# Altium PCB PCB1.PcbDoc (part 1 of 3)
Units mil, origin at the board's own origin, x right, y up, seen from the top; angles counter-clockwise.
Board outline 3898.53 x 2644.2 mil, 4 copper layers (Top Layer, Layer 1, Layer 2, Bottom Layer), stack 64.602 mil thick; 147 components, 160 nets, 823 pads, 446 vias.
Unrouted connection lines stored in the file: 1.
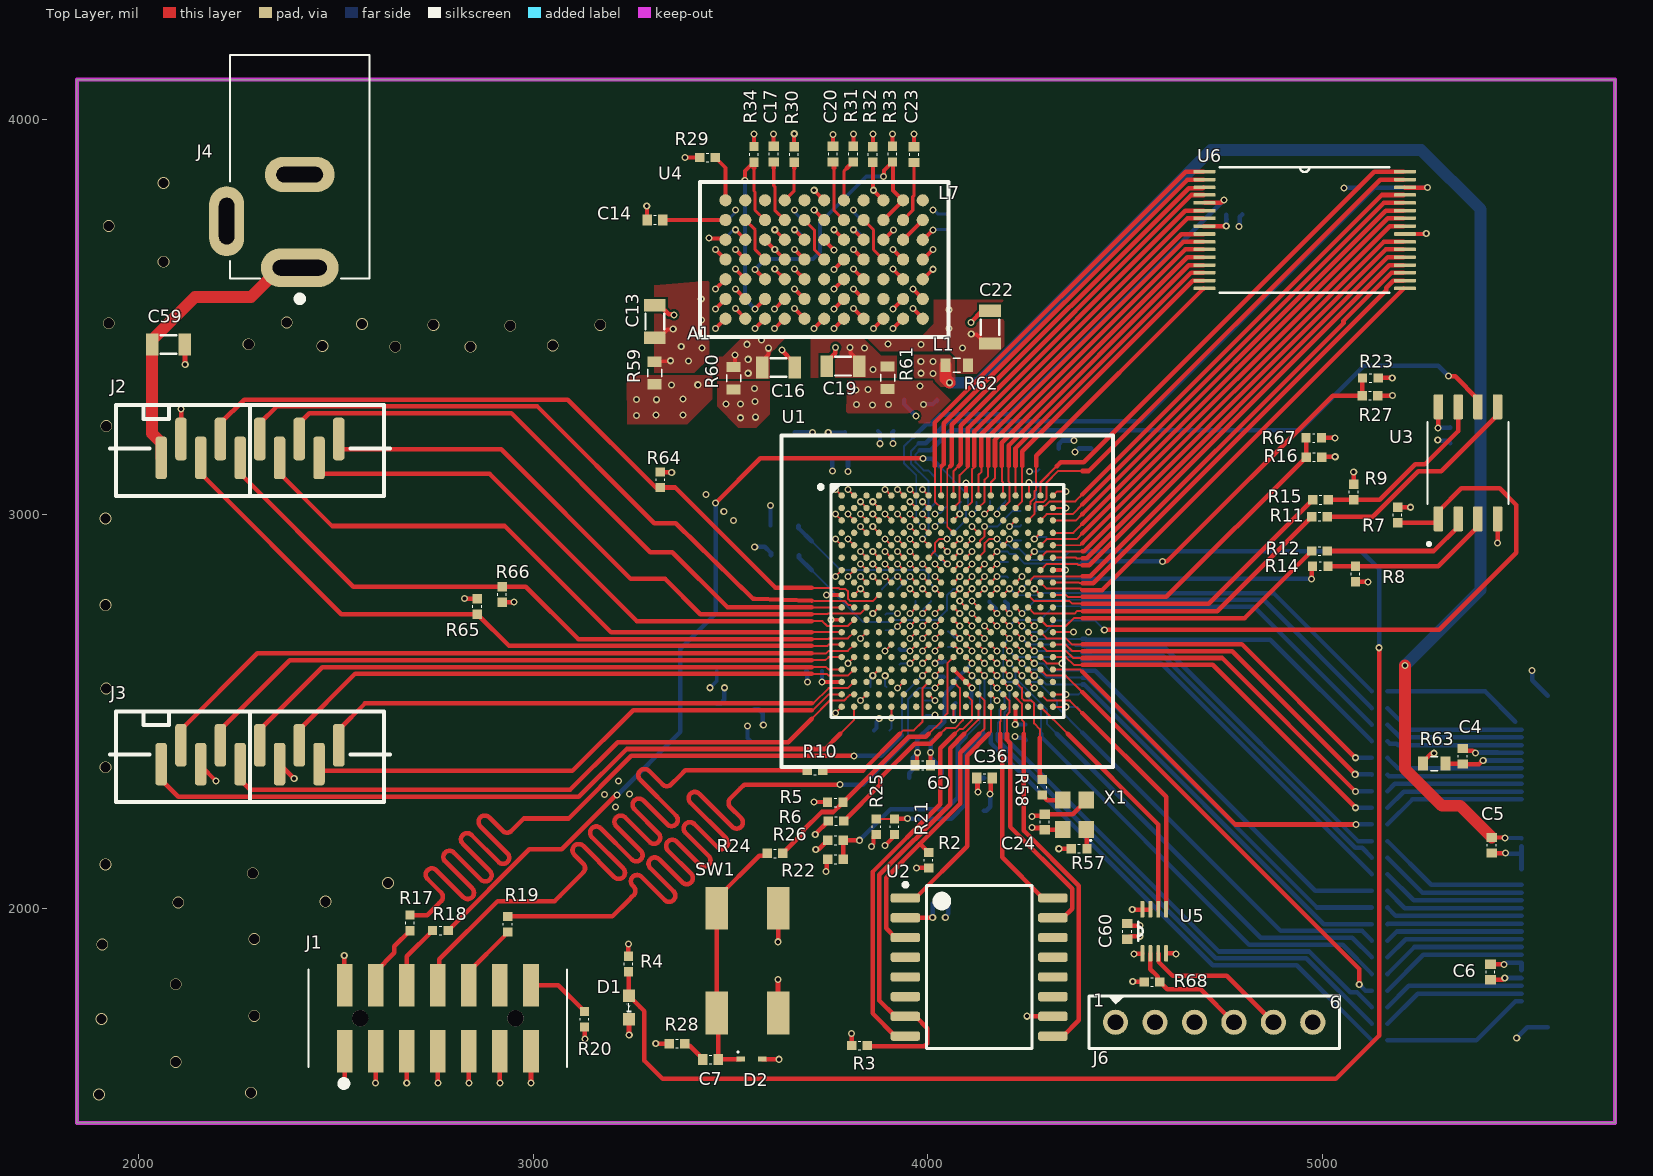
[diagram p0: Top Layer view]
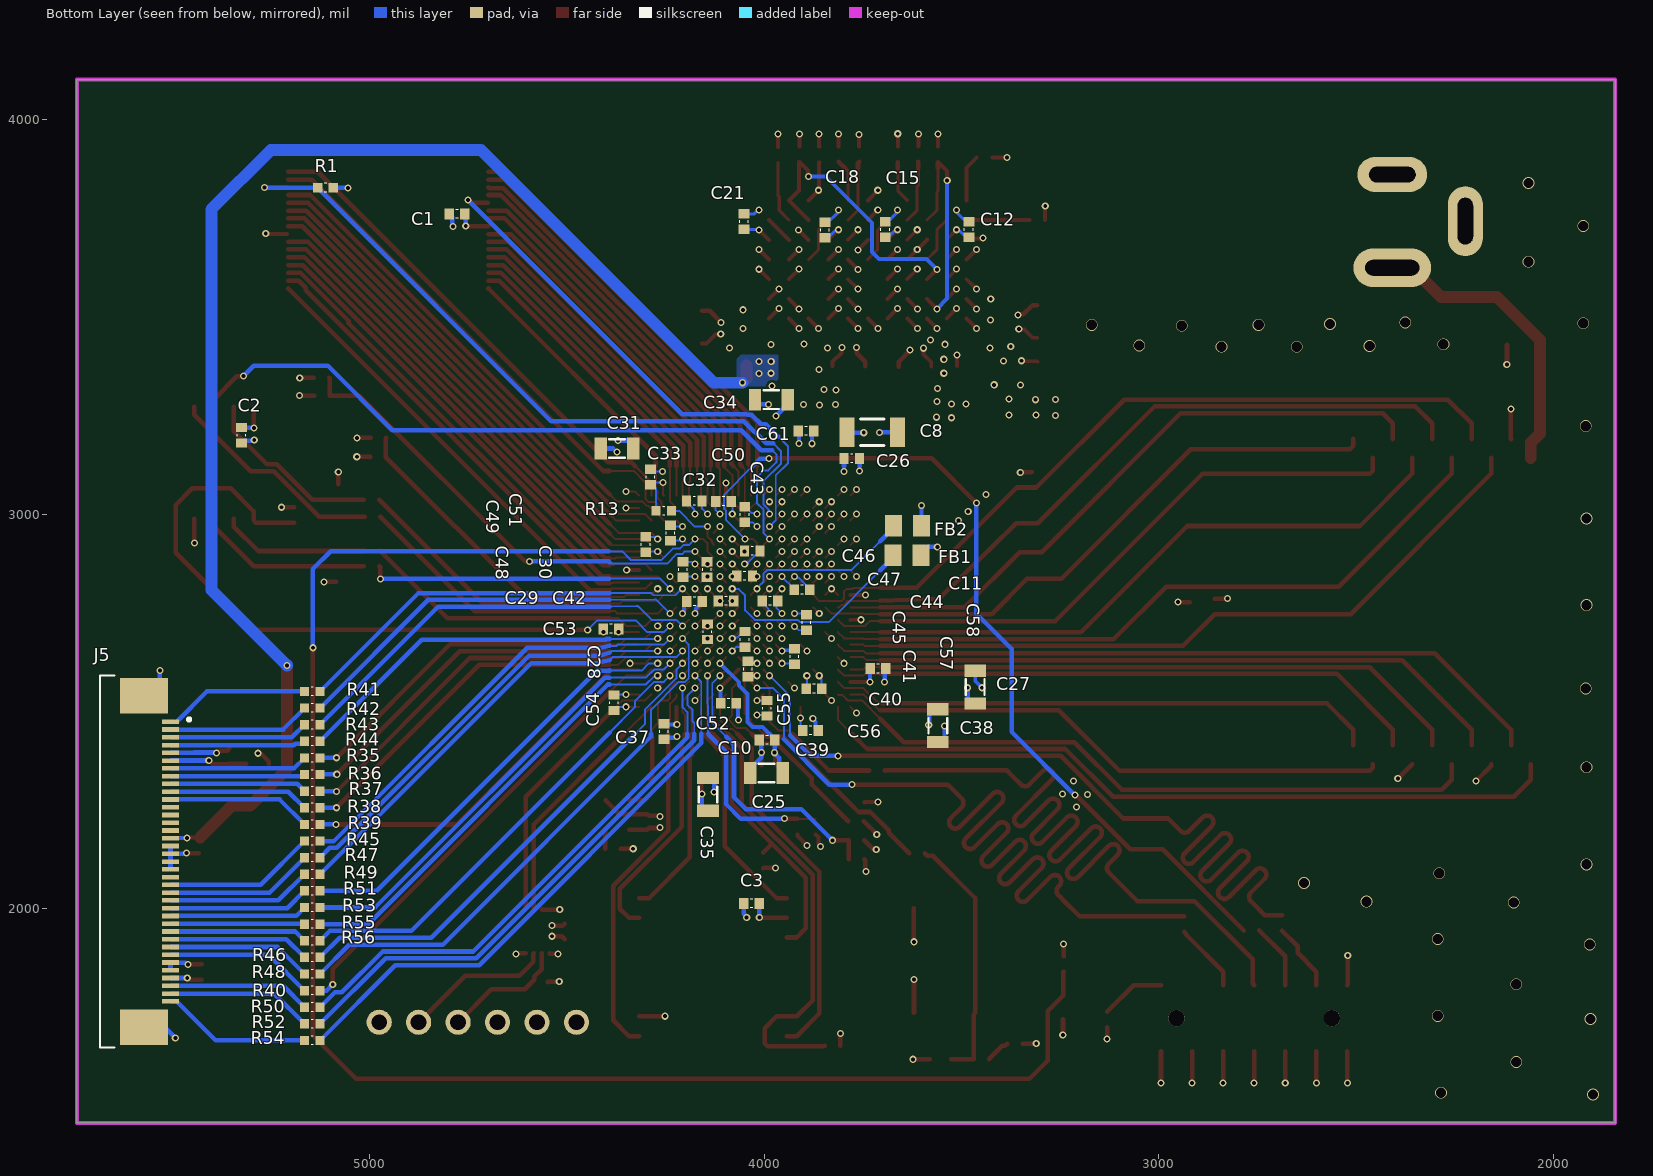
[diagram p1: Bottom Layer view, seen from below]
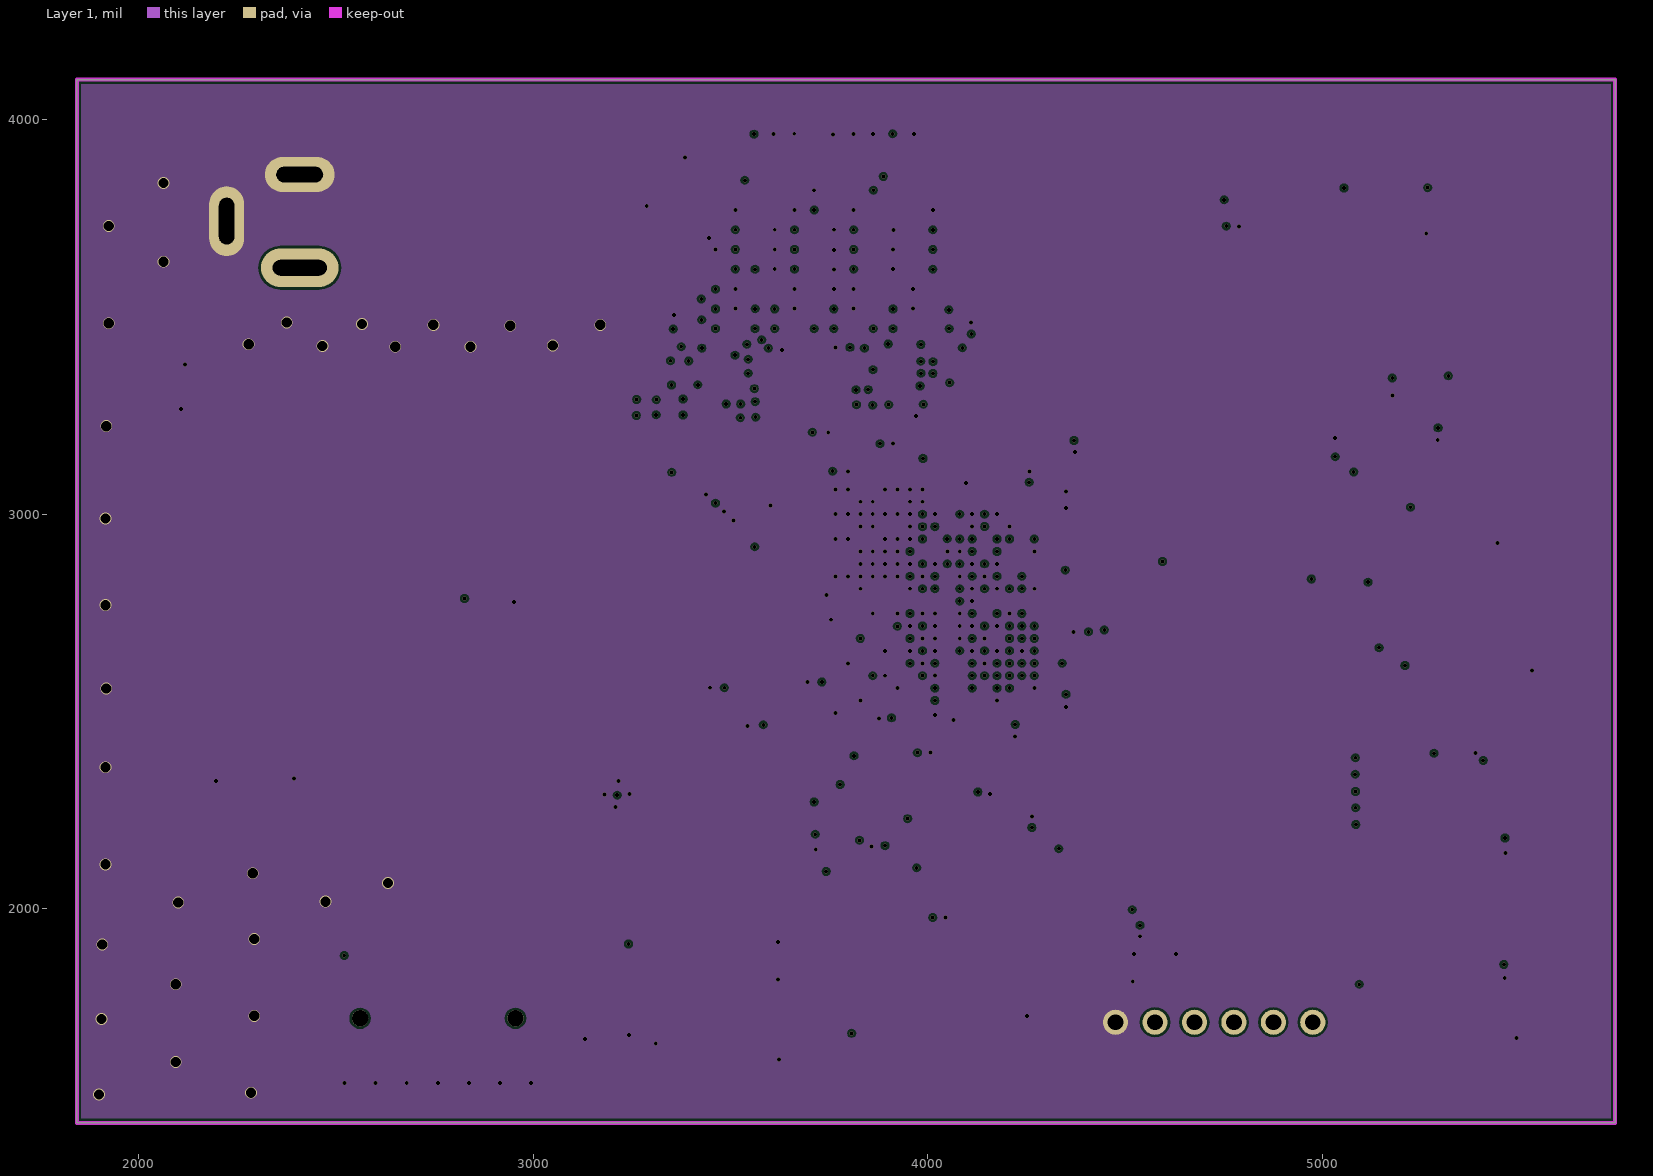
[diagram p2: Layer 1]
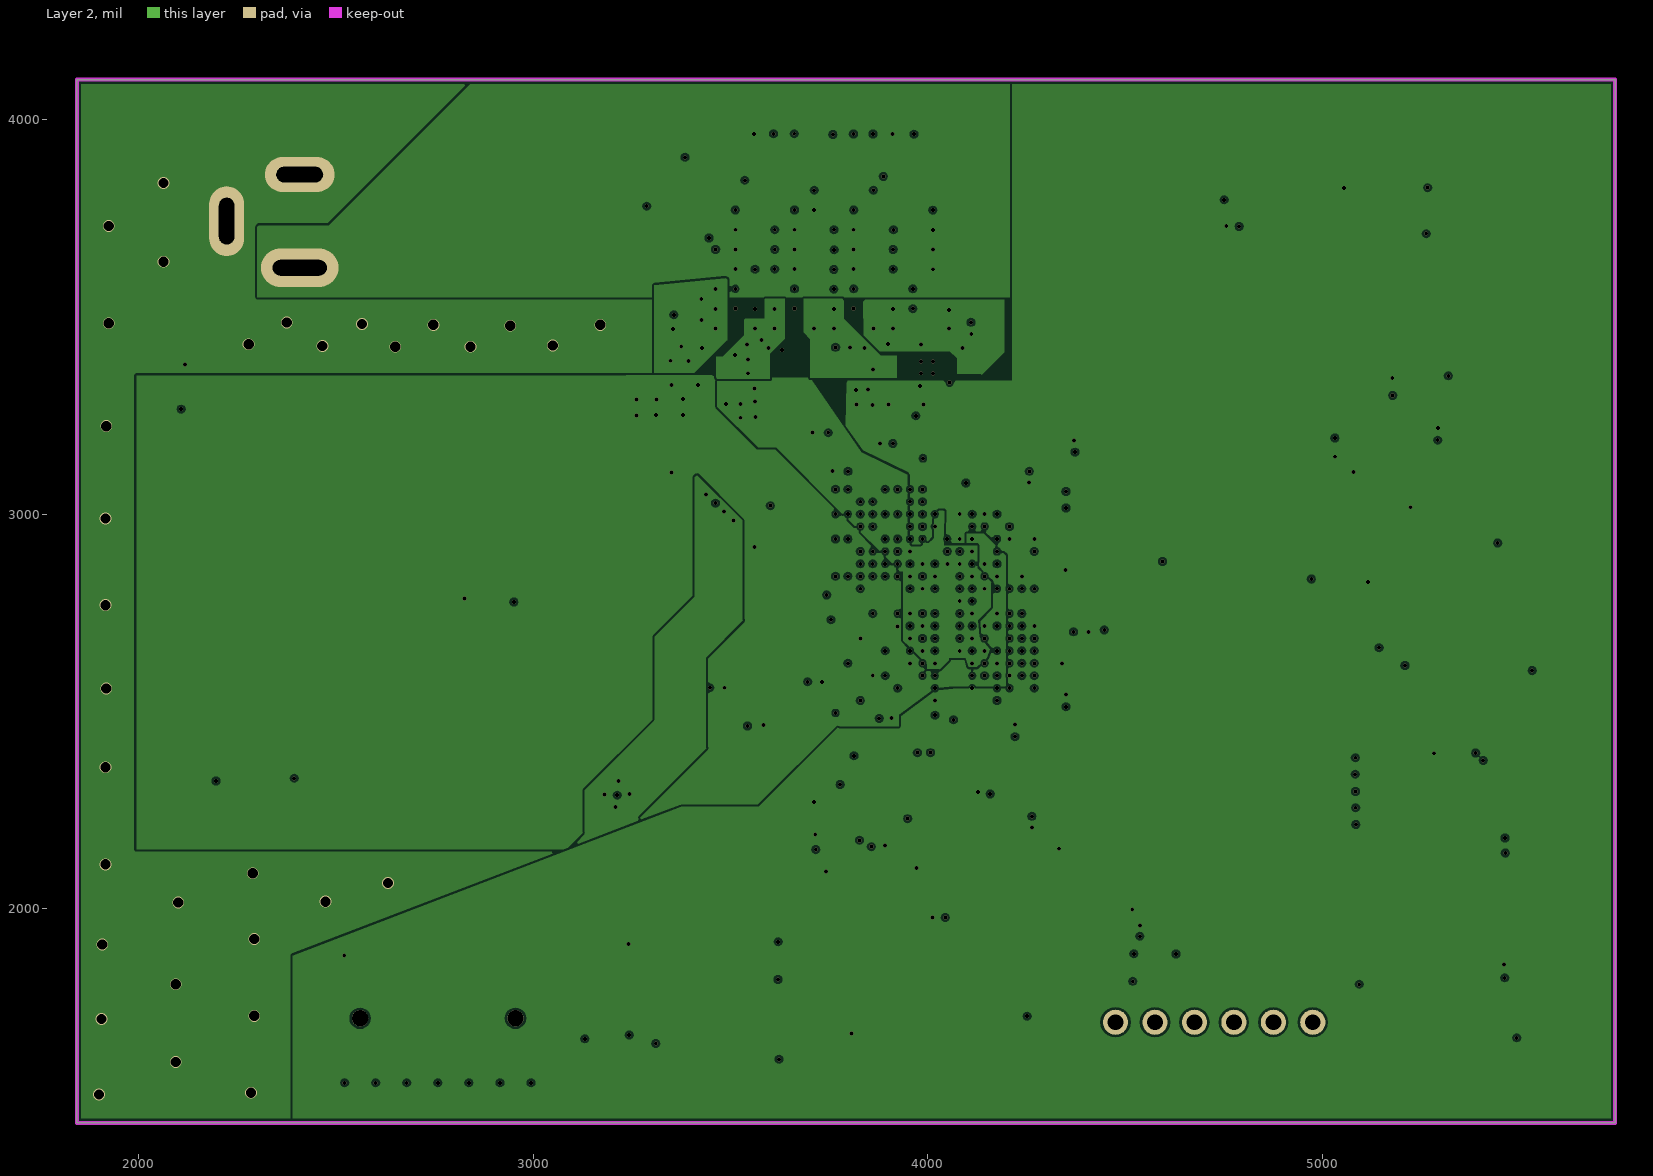
[diagram p3: Layer 2]
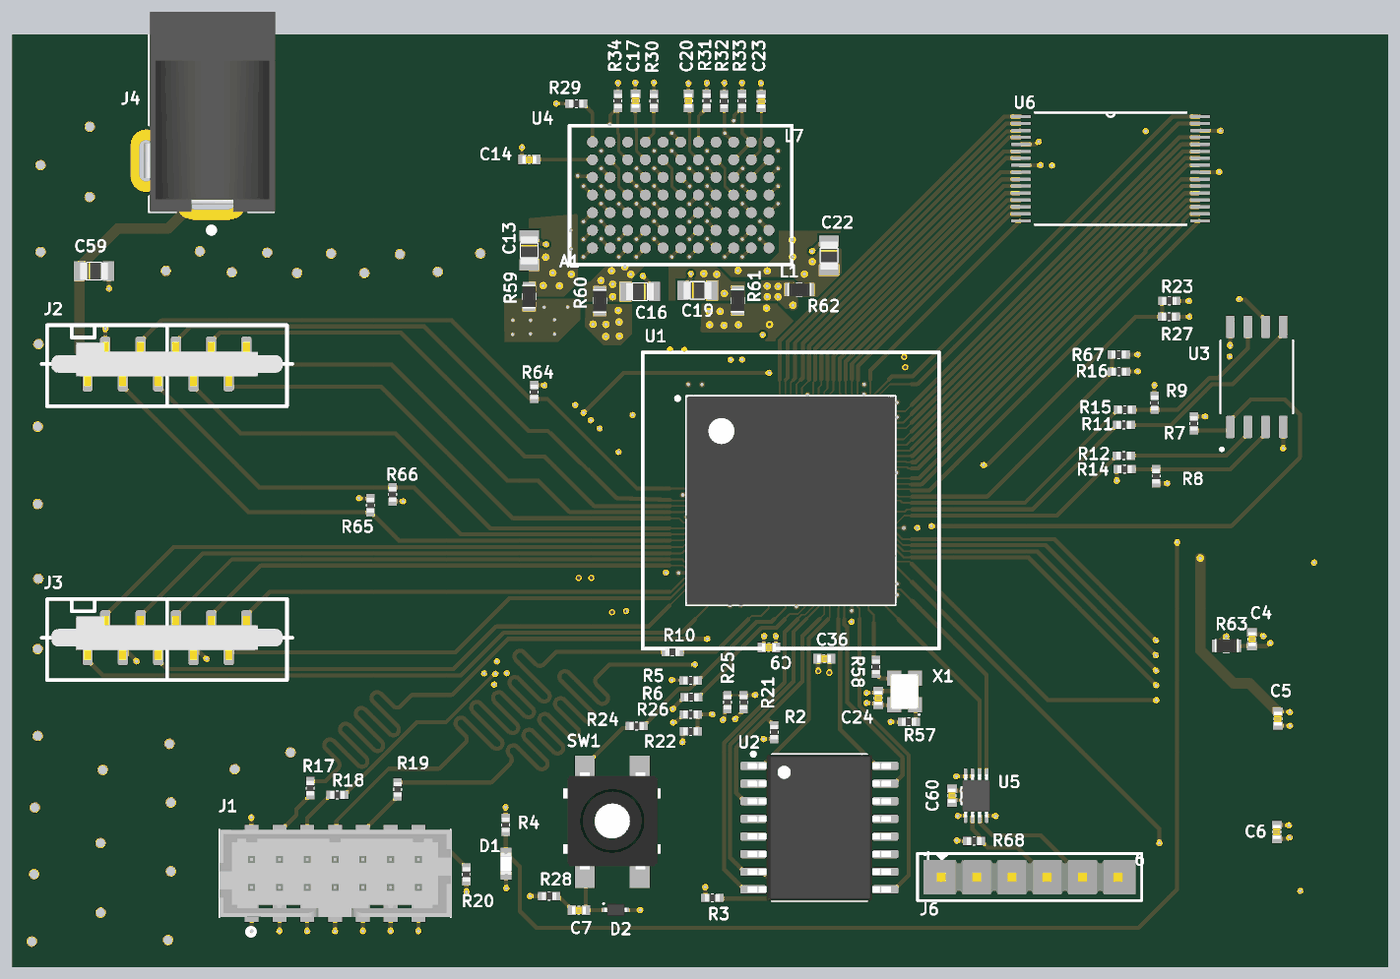
[diagram p6: 3D render of the assembled board from above, using the file's embedded part models]
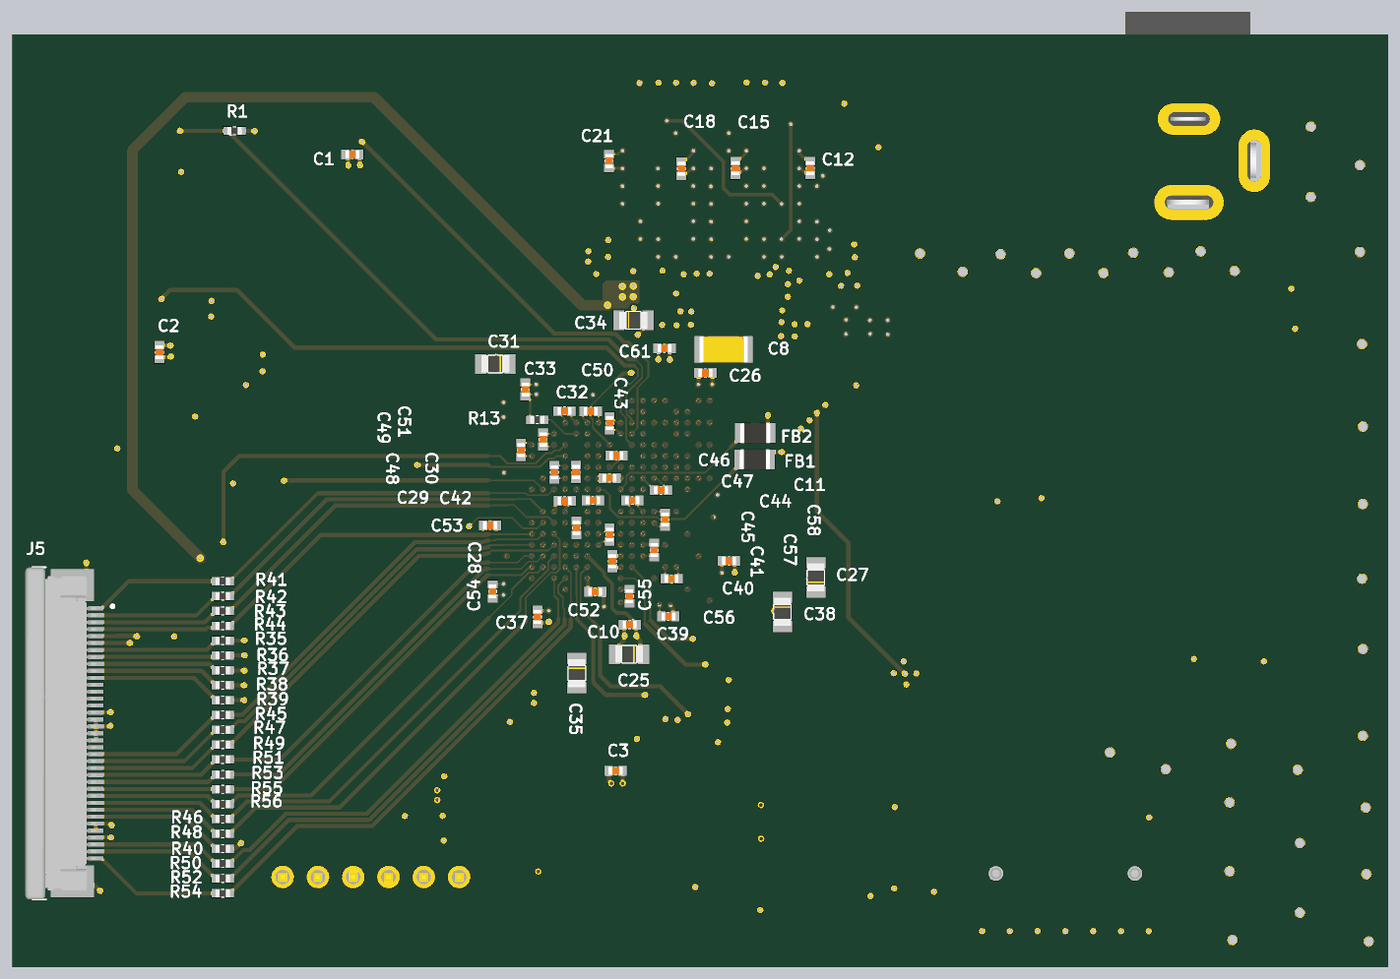
[diagram p7: 3D render of the assembled board from below, using the file's embedded part models]

## Layer stack, top to bottom
Top Solder: solder mask 1, Solder Resist, Dk 3.5
Top Layer: signal copper 1.4
Dielectric 2: prepreg 6.701, PP-006, Dk 3.69
Layer 1: signal copper 0.7
Dielectric 1: dielectric 47, FR-4, Dk 3.69
Layer 2: signal copper 0.7
Dielectric 3: prepreg 6.701, PP-006, Dk 3.69
Bottom Layer: signal copper 1.4
Bottom Solder: solder mask 1, Solder Resist, Dk 3.5

## Board outline
1843.2,1457.94 1843.2,4102.14 5741.73,4102.14 5741.73,1457.94

## Design rules (kind name [scope] priority, off if disabled: settings)
BoardOutlineClearance [All] p1: gap=10 ignorepadtopadclearanceinfootprint=FALSE except(0: Arc-SplitContinuation Track-SplitContinuation SMDPad-SplitContinuation THPad-SplitContinuation Via-SplitContinuation Fill-SplitContinuation Poly-SplitContinuation Region-SplitContinuation Text-SplitContinuation)
Clearance ClearancePolygons [All vs InPolygon] p1: gap=6 ignorepadtopadclearanceinfootprint=FALSE
Clearance Clearance_XBGA [WithinRoom('XBGA')] p2: gap=4.2 ignorepadtopadclearanceinfootprint=FALSE
Clearance Clearance_Regulator [WithinRoom('Regulator')] p3: gap=5 ignorepadtopadclearanceinfootprint=FALSE
Clearance [All] p4: gap=5 ignorepadtopadclearanceinfootprint=FALSE
FanoutControl Fanout_BGA_Regulator [WithinRoom('Regulator')] p1: bgadir=Out bgaviamode=Centered fanoutstyle=BGA fanoutdirection=Alternating viagrid=1 // Fanout_BGA (Default Rule)
FanoutControl Fanout_BGA [IsBGA] p2: bgadir=Out bgaviamode=Centered fanoutstyle=BGA fanoutdirection=Alternating viagrid=1 // Fanout_BGA (Default Rule)
FanoutControl Fanout_LCC [IsLCC] p3: bgadir=Out bgaviamode=Centered fanoutstyle=Auto fanoutdirection=Alternating viagrid=1 // Fanout_LCC (Default Rule)
FanoutControl Fanout_SOIC [IsSOIC] p4: bgadir=Out bgaviamode=Centered fanoutstyle=Auto fanoutdirection=Alternating viagrid=1 // Fanout_SOIC (Default Rule)
FanoutControl Fanout_Small [(CompPinCount < 5)] p5: bgadir=Out bgaviamode=Centered fanoutstyle=Auto fanoutdirection=OutThenIn viagrid=1 // Fanout_Small (Default Rule)
FanoutControl Fanout_Default [All] p6: bgadir=Out bgaviamode=Centered fanoutstyle=Auto fanoutdirection=Alternating viagrid=1 // Fanout_Default (Default Rule)
HoleSize [All] p1: absolutevalues=TRUE maxlimit=200 minlimit=8 maxpercent=80.000 minpercent=20.000
MatchedLengths MatchLengths_xSignals_U1_J1 [InxSignalClass('xSignals_U1_J1_MatchLengthsClass')] p1: tolerance=100 checknetsindiffpair=FALSE checkdiffpairvsdiffpair=TRUE checkxsignals=TRUE checkothers=TRUE
MinimumAnnularRing InnerLayers [OnLayer('Layer 1')] p1: minimumring=0
MinimumAnnularRing InnerLayers_1 [OnLayer('Layer 2')] p2: minimumring=0
MinimumAnnularRing [OnLayer('Top Layer')] p3: minimumring=4
MinimumAnnularRing MinimumAnnularRing_1 [OnLayer('Bottom Layer')] p4: minimumring=4
MinimumSolderMaskSliver [All] p1: minsoldermaskwidth=4
PlaneConnect [All] p1: planeconnectstyle=Relief reliefexpansion=20 reliefentries=4 reliefconductorwidth=15 reliefairgap=10
PolygonConnect [All] p1: connectstyle=Direct reliefconductorwidth=15 reliefentries=4 polygonreliefangle="90 Angle" airgapwidth=10
RoomDefinition XBGA [WithinRoom('XBGA')] p1: confinementstyle=ConfineIn formatcopy=TRUE lockcomponents=FALSE outline 3705.7,3122.88 4391.92,3122.88 4391.92,2443.9 3705.7,2443.9
RoomDefinition Regulator [WithinRoom('Regulator')] p2: confinementstyle=ConfineIn formatcopy=TRUE lockcomponents=FALSE outline 3379.94,3423.75 3379.94,3877.27 4097.86,3877.27 4097.86,3423.75
RoutingVias RoutingVias_XBGA [WithinRoom('XBGA')] p1: holewidth=10 width=18 viastyle="Through Hole" minholewidth=10 minwidth=18 maxholewidth=10 maxwidth=18
RoutingVias RoutingVias_Regulator [WithinRoom('Regulator')] p2: holewidth=10 width=18 viastyle="Through Hole" minholewidth=10 minwidth=18 maxholewidth=10 maxwidth=18
RoutingVias [All] p3: holewidth=10 width=18 viastyle="Through Hole" minholewidth=10 minwidth=18 maxholewidth=10 maxwidth=18
SilkToSilkClearance [All] p1: silktosilkclearance=4
SilkToSolderMaskClearance [IsPad vs IsText] p1: minsilkscreentomaskgap=4 clearancetoexposedcopper=TRUE
SolderMaskExpansion [All] p1: expansion=1.5 istentingtop=FALSE
Width Width_XBGA [WithinRoom('XBGA')] p1: maxlimit=10 minlimit=5 preferedwidth=5
Width Width_Regulator [WithinRoom('Regulator')] p2: maxlimit=10 minlimit=8 preferedwidth=8
Width Width_1 [InNet('+3V1')] p3: maxlimit=30 minlimit=10 preferedwidth=10
Width Width_2 [InNet('+5')] p4: maxlimit=30 minlimit=10 preferedwidth=10
Width [All] p5: maxlimit=12.33 minlimit=5 preferedwidth=11.55 midlayer1_minwidth=9.25 midlayer1_maxwidth=10.31 midlayer1_prefwidth=9.25 midlayer2_minwidth=9.25 midlayer2_maxwidth=10.31 midlayer2_prefwidth=9.25 impedanceprofiledriven=TRUE impedanceprofileid={B83657C2-D7FB-4F55-9AAE-FD7015835576} impedanceprofilevalue=50.000000 minimp=50.000000 maximp=50.000000 favimp=50.000000
20 further rules are at their usual default settings.

## Classes and differential pairs
component class "Room Definition 1": R10 R17 R18 R19 R20
component class ArtixBank34: C59 J2 J3 R64 R65 R66
component class Power: C12 C13 C14 C15 C16 C17 C18 C19 C20 C21 C22 C23 J4 R29 R30 R31 R32 R33 R34 R59 R60 R61 R62 U4
component class ArtixBank14: C3 C4 C5 C6 C24 C60 J5 J6 R2 R3 R35 R36 R37 R38 R39 R40 R41 R42 R43 R44 R45 R46 R47 R48 R49 R50 R51 R52 R53 R54 R55 R56 R57 R58 R63 R68 U2 U5 X1
component class ArtixPower: C8 C9 C10 C11 C25 C26 C27 C28 C29 C30 C31 C32 C33 C34 C35 C36 C37 C38 C39 C40 C41 C42 C43 C44 C45 C46 C47 C48 C49 C50 C51 C52 C53 C54 C55 C56 C57 C58 FB1 FB2
component class ArtixConfig: C2 C7 C61 D1 D2 J1 R4 R5 R6 R7 R8 R9 R10 R11 R12 R13 R14 R15 R16 R17 R18 R19 R20 R21 R22 R23 R24 R25 R26 R27 R28 R67 SW1 U3
component class ArtixBank15: C1 R1 U1 U6

## Components (designator, comment, footprint, x,y, rotation, side; value= is the part's Value field where it differs from the comment)
C1 "100nf" 0402Footprint#1 4778.28,3761.3 r0 bottom
C2 "100nf" 0402Footprint#1 5324.51,3200.7 r270 bottom
C3 "100nf" 0402Footprint#1 4032.23,2013.88 r0 bottom
C4 "1uf" 0402Footprint#2 5355.59,2387 r90 top
C5 "1uf" 0402Footprint#2 5429.16,2161.69 r270 top
C6 "1uf" 0402Footprint#2 5425.84,1840.59 r270 top
C7 "100nf" 0402Footprint#2 3448.66,1618.77 r0 top
C8 "100uf" 1206 3726.2,3208.46 r0 bottom
C9 "4.7uf" 0402Footprint#1 3987,2364.18 r0 top
C10 "0.47uf" 0402Footprint#1 3992.35,2428.26 r0 bottom
C11 "0.47uf" 0402Footprint#1 3903.71,2809.19 r180 bottom
C12 "10uf" 0402Footprint#1 3481.15,3722.41 r90 bottom
C13 "47uf" 0805FOOTPRINT#1 3307.82,3489.21 r270 top
C14 "100nf" 0402Footprint#2 3308.05,3746.82 r0 top
C15 "10uf" 0402Footprint#1 3692.94,3722.52 r90 bottom
C16 "47uf" 0805FOOTPRINT#1 3621.71,3372.55 r180 top
C17 "100nf" 0402Footprint#2 3609.28,3913.28 r270 top
C18 "10uf" 0402Footprint#1 3845.86,3720.77 r90 bottom
C19 "47uf" 0805FOOTPRINT#1 3785.02,3375.69 r0 top
C20 "100nf" 0402Footprint#2 3759.38,3913.22 r270 top
C21 "10uf" 0402Footprint#1 4050.81,3742.25 r90 bottom
C22 "47uf" 0805FOOTPRINT#1 4157.51,3474.59 r270 top
C23 "100nf" 0402Footprint#2 3965.26,3911.96 r270 top
C24 "100nf" 0402Footprint#2 4296.22,2220.6 r90 top
C25 "47uf" 0805FOOTPRINT#2 3993.93,2344.39 r0 bottom
C26 "0.47uf" 0402Footprint#1 3777.79,3141.48 r0 bottom
C27 "47uf" 0805FOOTPRINT#2 3464.88,2562.24 r90 bottom
C28 "4.7uf" 0402Footprint#1 4143.2,2702.68 r270 bottom
C29 "0.47uf" 0402Footprint#1 4176.29,2779.51 r0 bottom
C30 "0.47uf" 0402Footprint#1 4144.62,2860.84 r270 bottom
C31 "47uf" 0805FOOTPRINT#2 4372.76,3167.16 r0 bottom
C32 "4.7uf" 0402Footprint#1 4177.03,3033.99 r0 bottom
C33 "0.47uf" 0402Footprint#1 4287.97,3094.78 r90 bottom
C34 "47uf" 0805FOOTPRINT#2 3981.82,3290.91 r180 bottom
C35 "47uf" 0805FOOTPRINT#2 4142.26,2290.67 r270 bottom
C36 "4.7uf" 0402Footprint#2 4143.5,2332.12 r0 top
C37 "0.47uf" 0402Footprint#1 4253.9,2450.18 r270 bottom
C38 "47uf" 0805FOOTPRINT#2 3559.77,2464.5 r270 bottom
C39 "4.7uf" 0402Footprint#1 3882.69,2452.1 r180 bottom
C40 "0.47uf" 0402Footprint#1 3711.12,2609.1 r180 bottom
C41 "47nf" 0402Footprint#1 4041.15,2608.1 r270 bottom
C42 "47nf" 0402Footprint#1 4096.41,2780.55 r0 bottom
C43 "47nf" 0402Footprint#1 4049.07,2999.56 r90 bottom
C44 "47nf" 0402Footprint#1 3985.01,2780.32 r0 bottom
C45 "47nf" 0402Footprint#1 4048.93,2683.43 r90 bottom
C46 "47nf" 0402Footprint#1 4030,2907.46 r0 bottom
C47 "47nf" 0402Footprint#1 4049.34,2843.78 r0 bottom
C48 "47nf" 0402Footprint#1 4205.72,2860.27 r90 bottom
C49 "47nf" 0402Footprint#1 4300.1,2923.49 r270 bottom
C50 "47nf" 0402Footprint#1 4102.76,3033.26 r0 bottom
C51 "47nf" 0402Footprint#1 4237.57,2953.08 r90 bottom
C52 "47nf" 0402Footprint#1 4090,2521.61 r180 bottom
C53 "47nf" 0402Footprint#1 4387.81,2710.09 r180 bottom
C54 "47nf" 0402Footprint#1 4380.57,2522.58 r270 bottom
C55 "47nf" 0402Footprint#1 3992.8,2508.84 r270 bottom
C56 "47nf" 0402Footprint#1 3873.76,2558.2 r0 bottom
C57 "47nf" 0402Footprint#1 3922.99,2639.99 r90 bottom
C58 "47nf" 0402Footprint#1 3892.31,2726.17 r90 bottom
C59 "47uf" 0805FOOTPRINT#1 2075.04,3430.51 r0 top
C60 "100nf" 0402Footprint#2 4505.41,1943.34 r270 top
C61 "10nf" 0402Footprint#1 3893.5,3211.32 r0 bottom
D1 "LTST-C190GKT" 0603 3242.42,1750.24 r90 top
D2 "UCLAMP3301H.TCT" SODFL160X70-2L 3553.11,1619.66 r0 top
FB1 "600OHM 100Mhz" 0805 3637.85,2896.54 r180 bottom
FB2 "600OHM 100Mhz" 0805 3636.66,2971.58 r180 bottom
J1 "87832-1420" MOLEX_87832-1420 2757.83,1722.93 r90 top
J2 "SFM-110-02-L-S" SFM-110-02-L-S 2281.78,3167.25 r90 top
J3 "SFM-110-02-L-S" SFM-110-02-L-S 2281.78,2391.1 r90 top
J4 "PJ-002A" CUI_PJ-002A 2407.83,3625.3 r90 top
J5 "3-1734592-7" TE_3-1734592-7 5504.66,2120.16 r270 bottom
J6 "SAMTEC-HTSW-106-07-X-SJ" SAMTEC-HTSW-106-07-X-S 4725.62,1712.95 r0 top
R1 "1K" RES_CRCW_0402#1 5111.82,3828.13 r0 bottom
R2 "10K" RES_CRCW_0402#2 4001.92,2123.49 r90 top
R3 "10K" RES_CRCW_0402#2 3826.63,1653.88 r0 top
R4 "300OHM" RES_CRCW_0402#2 3240.99,1860.85 r270 top
R5 "4.7K" RES_CRCW_0402#2 3765.39,2270.22 r0 top
R6 "4.7K" RES_CRCW_0402#2 3767.08,2222.82 r0 top
R7 "4.7K" RES_CRCW_0402#2 5190.65,2998.82 r270 top
R8 "4.7K" RES_CRCW_0402#2 5083.98,2849.06 r90 top
R9 "4.7K" RES_CRCW_0402#2 5079.67,3057.01 r270 top
R10 "0OHM" RES_CRCW_0402#2 3713.95,2351.06 r180 top
R11 "100OHM" RES_CRCW_0402#2 4992.74,2994.43 r180 top
R12 "100OHM" RES_CRCW_0402#2 4992.55,2907.31 r180 top
R13 "4.7K" RES_CRCW_0402#1 4254.25,3009.01 r0 bottom
R14 "100OHM" RES_CRCW_0402#2 4994.63,2869 r180 top
R15 "100OHM" RES_CRCW_0402#2 4995.52,3037.41 r180 top
R16 "1K" RES_CRCW_0402#2 4978.63,3145.36 r180 top
R17 "0OHM" RES_CRCW_0402#2 2687.28,1964.88 r270 top
R18 "0OHM" RES_CRCW_0402#2 2764.29,1945.43 r180 top
R19 "0OHM" RES_CRCW_0402#2 2935.17,1961.43 r270 top
R20 "0OHM" RES_CRCW_0402#2 3129.87,1720.45 r90 top
R21 "1K" RES_CRCW_0402#2 3915.2,2208.43 r90 top
R22 "NC" RES_CRCW_0402#2 3765.51,2125.84 r0 top
R23 "NC" RES_CRCW_0402#2 5121.5,3346.04 r180 top
R24 "22OHM" RES_CRCW_0402#2 3612.3,2140.93 r0 top
R25 "NC" RES_CRCW_0402#2 3869.49,2208.43 r270 top
R26 "1K" RES_CRCW_0402#2 3765.51,2174 r180 top
R27 "1K" RES_CRCW_0402#2 5120.47,3301.14 r0 top
R28 "22OHM" RES_CRCW_0402#2 3364.38,1658.66 r0 top
R29 "30.1K" RES_CRCW_0402#2 3441.38,3904.93 r0 top
R30 "90.9K" RES_CRCW_0402#2 3660.98,3912.67 r270 top
R31 "13.3K" RES_CRCW_0402#2 3811.01,3913.22 r270 top
R32 "14.5K" RES_CRCW_0402#2 3860.11,3912.34 r270 top
R33 "100K" RES_CRCW_0402#2 3910.49,3913.22 r270 top
R34 "100K" RES_CRCW_0402#2 3559.31,3912.81 r270 top
R35 "200" RES_CRCW_0402#1 5145.28,2382.86 r0 bottom
R36 "200" RES_CRCW_0402#1 5145.28,2340.74 r0 bottom
R37 "200" RES_CRCW_0402#1 5145.28,2298.61 r0 bottom
R38 "200" RES_CRCW_0402#1 5145.28,2256.49 r0 bottom
R39 "200" RES_CRCW_0402#1 5145.28,2214.37 r0 bottom
R40 "200" RES_CRCW_0402#1 5145.28,1793.13 r0 bottom
R41 "200" RES_CRCW_0402#1 5145.28,2551.36 r0 bottom
R42 "200" RES_CRCW_0402#1 5145.28,2509.23 r0 bottom
R43 "200" RES_CRCW_0402#1 5145.28,2467.11 r0 bottom
R44 "200" RES_CRCW_0402#1 5145.28,2424.98 r0 bottom
R45 "200" RES_CRCW_0402#1 5145.28,2172.24 r0 bottom
R46 "200" RES_CRCW_0402#1 5145.28,1877.38 r180 bottom
R47 "200" RES_CRCW_0402#1 5145.28,2130.12 r0 bottom
R48 "200" RES_CRCW_0402#1 5145.28,1835.25 r180 bottom
R49 "200" RES_CRCW_0402#1 5145.28,2087.99 r0 bottom
R50 "200" RES_CRCW_0402#1 5145.28,1751.01 r180 bottom
R51 "200" RES_CRCW_0402#1 5145.28,2045.87 r0 bottom
R52 "200" RES_CRCW_0402#1 5145.28,1708.88 r180 bottom
R53 "200" RES_CRCW_0402#1 5145.28,2003.75 r0 bottom
R54 "200" RES_CRCW_0402#1 5145.28,1666.76 r180 bottom
R55 "200" RES_CRCW_0402#1 5145.28,1961.62 r0 bottom
R56 "200" RES_CRCW_0402#1 5145.28,1919.5 r0 bottom
R57 "1K" RES_CRCW_0402#2 4383.42,2153.07 r0 top
R58 "0OHM" RES_CRCW_0402#2 4289.82,2308.66 r270 top
R59 "0.01OHM" RESC1508X06N 3307.55,3358.48 r90 top
R60 "0.01OHM" RESC1508X06N 3507.67,3345.65 r90 top
R61 "0.01OHM" RESC1508X06N 3898.25,3346.84 r90 top
R62 "0.01OHM" RESC1508X06N 4073.43,3378.21 r0 top
R63 "0.01OHM" RESC1508X06N 5283.63,2368.3 r0 top
R64 "NC" RES_CRCW_0402#2 3321.91,3088 r270 top
R65 "NC" RES_CRCW_0402#2 2858.01,2766.84 r270 top
R66 "10K" RES_CRCW_0402#2 2920.89,2797.43 r270 top
R67 "NC" RES_CRCW_0402#2 4977.89,3194.07 r0 top
R68 "100K" RES_CRCW_0402#1 4568.37,1814.77 r180 top
SW1 "B3SN-3012P" B3SN-3012P 3549.45,1871.32 r270 top
U1 "XC7A12T CSG325" BGA324C80P18X18_1500X1500X150 4049.23,2780.23 r0 top
U2 "MT25QL256ABA8ESF-0SIT" SOP127P1030X265-16N 4129.96,1852.77 r0 top
U3 "MX25L3233FM2I-08G" SOIC127P790X216-8N_MX25L3233FM2I-08G 5369.11,3130.72 r90 top
U4 "LTM4643" "LTM4643 15X9X2.42 05-08-1908" 3737.16,3646.21 r90 top
U5 "SN74LVC2G241DCUR" SOP50P310X90-8N 4573.86,1943.27 r90 top
U6 "IS62WV5128BLL-55HLI" SOIC50P1340X125-32N 4955.07,3720.89 r0 top
X1 "100MHZ" SIT8008AI-12-33E-100.000000E 4371.36,2238.61 r180 top

## Footprints (in the part's own frame and the unit in brackets; to place one, negate y for a bottom-side part, rotate by r counter-clockwise, add the part's x,y. Pads: shape width x height; smd on the part's side, far side on the other; paste and mask are expansions set on the pad)
0402Footprint#1 [mm]
  rect 0.6x0.7 smd mask+0.051: 1(-0.5,0) 2(0.5,0)
  silkscreen extent -0.08,-0.28 0.08,0.28, body extent -0.5,-0.28 0.5,0.27, height 0.5
0402Footprint#2 [mm]
  rect 0.6x0.7 smd: 1(-0.5,0) 2(0.5,0)
  silkscreen extent -0.08,-0.28 0.08,0.28, body extent -0.5,-0.28 0.5,0.27, height 0.5
0603 [mm]
  rect 0.8x0.8 smd: 1(-0.75,0) 2(0.75,0)
  silkscreen extent -0.28,-0.15 0.28,0.15, body extent -0.8,-0.4 0.8,0.4, height 0.8
0805 [mm] "Chip Inductor, 2-Leads, Body 2.00x1.25mm, IPC Medium Density"
  rect 1.1x1.4 smd mask+0.051: 1(-0.9,0) 2(0.9,0)
  body extent -1.1,-0.73 1.1,0.72, height 1.45
0805FOOTPRINT#1 [mm]
  rect 0.8x1.4 smd: 1(-1.05,0) 2(1.05,0)
  silkscreen extent -0.5,-0.6 0.5,0.6, body extent -1,-0.62 1,0.62, height 1.45
0805FOOTPRINT#2 [mm]
  rect 0.8x1.4 smd paste+0 mask+0.051: 1(-1.05,0) 2(1.05,0)
  silkscreen extent -0.5,-0.6 0.5,0.6, body extent -1,-0.62 1,0.62, height 1.45
1206 [mm] "Chip Capacitor, 2-Leads, Body 3.20x1.60mm, IPC Medium Density"
  rect 0.95x1.9 smd: 1(-1.625,0) 2(1.625,0)
  silkscreen extent -0.75,-0.85 0.75,0.85, body extent -1.75,-0.95 1.75,0.95, height 1.6
B3SN-3012P [mm]
  rect 2.75x1.45 smd: 1(3.426,-2.135) 2(-3.324,-2.135) 3(3.426,1.815) 4(-3.324,1.815)
  body extent -3.52,-3.68 3.48,3.32, height 3.1
BGA324C80P18X18_1500X1500X150 [mm] "BGA, 324-Leads, Body 15.00x15.00mmx1.50mm, Pitch 0.80mm"
  round 0.41 smd: A1(-6.8,6.8) A2(-6,6.8) A3(-5.2,6.8) A4(-4.4,6.8) A5(-3.6,6.8) A6(-2.8,6.8) A7(-2,6.8) A8(-1.2,6.8) A9(-0.4,6.8) A10(0.4,6.8) A11(1.2,6.8) A12(2,6.8) A13(2.8,6.8) A14(3.6,6.8) A15(4.4,6.8) A16(5.2,6.8) A17(6,6.8) A18(6.8,6.8) B1(-6.8,6) B2(-6,6) B3(-5.2,6) B4(-4.4,6) B5(-3.6,6) B6(-2.8,6) B7(-2,6) B8(-1.2,6) B9(-0.4,6) B10(0.4,6) B11(1.2,6) B12(2,6) B13(2.8,6) B14(3.6,6) B15(4.4,6) B16(5.2,6) B17(6,6) B18(6.8,6) C1(-6.8,5.2) C2(-6,5.2) C3(-5.2,5.2) C4(-4.4,5.2) C5(-3.6,5.2) C6(-2.8,5.2) C7(-2,5.2) C8(-1.2,5.2) C9(-0.4,5.2) C10(0.4,5.2) C11(1.2,5.2) C12(2,5.2) C13(2.8,5.2) C14(3.6,5.2) C15(4.4,5.2) C16(5.2,5.2) C17(6,5.2) C18(6.8,5.2) D1(-6.8,4.4) D2(-6,4.4) D3(-5.2,4.4) D4(-4.4,4.4) D5(-3.6,4.4) D6(-2.8,4.4) D7(-2,4.4) D8(-1.2,4.4) D9(-0.4,4.4) D10(0.4,4.4) D11(1.2,4.4) D12(2,4.4) D13(2.8,4.4) D14(3.6,4.4) D15(4.4,4.4) D16(5.2,4.4) D17(6,4.4) D18(6.8,4.4) E1(-6.8,3.6) E2(-6,3.6) E3(-5.2,3.6) E4(-4.4,3.6) E5(-3.6,3.6) E6(-2.8,3.6) E7(-2,3.6) E8(-1.2,3.6) E9(-0.4,3.6) E10(0.4,3.6) E11(1.2,3.6) E12(2,3.6) E13(2.8,3.6) E14(3.6,3.6) E15(4.4,3.6) E16(5.2,3.6) E17(6,3.6) E18(6.8,3.6) F1(-6.8,2.8) F2(-6,2.8) F3(-5.2,2.8) F4(-4.4,2.8) F5(-3.6,2.8) F6(-2.8,2.8) F7(-2,2.8) F8(-1.2,2.8) F9(-0.4,2.8) F10(0.4,2.8) F11(1.2,2.8) F12(2,2.8) F13(2.8,2.8) F14(3.6,2.8) F15(4.4,2.8) F16(5.2,2.8) F17(6,2.8) F18(6.8,2.8) G1(-6.8,2) G2(-6,2) G3(-5.2,2) G4(-4.4,2) G5(-3.6,2) G6(-2.8,2) G7(-2,2) G8(-1.2,2) G9(-0.4,2) G10(0.4,2) G11(1.2,2) G12(2,2) G13(2.8,2) G14(3.6,2) G15(4.4,2) G16(5.2,2) G17(6,2) G18(6.8,2) H1(-6.8,1.2) H2(-6,1.2) H3(-5.2,1.2) H4(-4.4,1.2) H5(-3.6,1.2) H6(-2.8,1.2) H7(-2,1.2) H8(-1.2,1.2) H9(-0.4,1.2) H10(0.4,1.2) H11(1.2,1.2) H12(2,1.2) H13(2.8,1.2) H14(3.6,1.2) H15(4.4,1.2) H16(5.2,1.2) H17(6,1.2) H18(6.8,1.2) J1(-6.8,0.4) J2(-6,0.4) J3(-5.2,0.4) J4(-4.4,0.4) J5(-3.6,0.4) J6(-2.8,0.4) J7(-2,0.4) J8(-1.2,0.4) J9(-0.4,0.4) J10(0.4,0.4) J11(1.2,0.4) J12(2,0.4) J13(2.8,0.4) J14(3.6,0.4) J15(4.4,0.4) J16(5.2,0.4) J17(6,0.4) J18(6.8,0.4) K1(-6.8,-0.4) K2(-6,-0.4) K3(-5.2,-0.4) K4(-4.4,-0.4) K5(-3.6,-0.4) K6(-2.8,-0.4) K7(-2,-0.4) K8(-1.2,-0.4) K9(-0.4,-0.4) K10(0.4,-0.4) K11(1.2,-0.4) K12(2,-0.4) K13(2.8,-0.4) K14(3.6,-0.4) K15(4.4,-0.4) K16(5.2,-0.4) K17(6,-0.4) K18(6.8,-0.4) L1(-6.8,-1.2) L2(-6,-1.2) L3(-5.2,-1.2) L4(-4.4,-1.2) L5(-3.6,-1.2) L6(-2.8,-1.2) L7(-2,-1.2) L8(-1.2,-1.2) L9(-0.4,-1.2) L10(0.4,-1.2) L11(1.2,-1.2) L12(2,-1.2) L13(2.8,-1.2) L14(3.6,-1.2) L15(4.4,-1.2) L16(5.2,-1.2) L17(6,-1.2) L18(6.8,-1.2) M1(-6.8,-2) M2(-6,-2) M3(-5.2,-2) M4(-4.4,-2) M5(-3.6,-2) M6(-2.8,-2) M7(-2,-2) M8(-1.2,-2) M9(-0.4,-2) M10(0.4,-2) M11(1.2,-2) M12(2,-2) M13(2.8,-2) M14(3.6,-2) M15(4.4,-2) M16(5.2,-2) M17(6,-2) M18(6.8,-2) N1(-6.8,-2.8) N2(-6,-2.8) N3(-5.2,-2.8) N4(-4.4,-2.8) N5(-3.6,-2.8) N6(-2.8,-2.8) N7(-2,-2.8) N8(-1.2,-2.8) N9(-0.4,-2.8) N10(0.4,-2.8) N11(1.2,-2.8) N12(2,-2.8) N13(2.8,-2.8) N14(3.6,-2.8) N15(4.4,-2.8) N16(5.2,-2.8) N17(6,-2.8) N18(6.8,-2.8) P1(-6.8,-3.6) P2(-6,-3.6) P3(-5.2,-3.6) P4(-4.4,-3.6) P5(-3.6,-3.6) P6(-2.8,-3.6) P7(-2,-3.6) P8(-1.2,-3.6) P9(-0.4,-3.6) P10(0.4,-3.6) P11(1.2,-3.6) P12(2,-3.6) P13(2.8,-3.6) P14(3.6,-3.6) P15(4.4,-3.6) P16(5.2,-3.6) P17(6,-3.6) P18(6.8,-3.6) R1(-6.8,-4.4) R2(-6,-4.4) R3(-5.2,-4.4) R4(-4.4,-4.4) R5(-3.6,-4.4) R6(-2.8,-4.4) R7(-2,-4.4) R8(-1.2,-4.4) R9(-0.4,-4.4) R10(0.4,-4.4) R11(1.2,-4.4) R12(2,-4.4) R13(2.8,-4.4) R14(3.6,-4.4) R15(4.4,-4.4) R16(5.2,-4.4) R17(6,-4.4) R18(6.8,-4.4) T1(-6.8,-5.2) T2(-6,-5.2) T3(-5.2,-5.2) T4(-4.4,-5.2) T5(-3.6,-5.2) T6(-2.8,-5.2) T7(-2,-5.2) T8(-1.2,-5.2) T9(-0.4,-5.2) T10(0.4,-5.2) T11(1.2,-5.2) T12(2,-5.2) T13(2.8,-5.2) T14(3.6,-5.2) T15(4.4,-5.2) T16(5.2,-5.2) T17(6,-5.2) T18(6.8,-5.2) U1(-6.8,-6) U2(-6,-6) U3(-5.2,-6) U4(-4.4,-6) U5(-3.6,-6) U6(-2.8,-6) U7(-2,-6) U8(-1.2,-6) U9(-0.4,-6) U10(0.4,-6) U11(1.2,-6) U12(2,-6) U13(2.8,-6) U14(3.6,-6) U15(4.4,-6) U16(5.2,-6) U17(6,-6) U18(6.8,-6) V1(-6.8,-6.8) V2(-6,-6.8) V3(-5.2,-6.8) V4(-4.4,-6.8) V5(-3.6,-6.8) V6(-2.8,-6.8) V7(-2,-6.8) V8(-1.2,-6.8) V9(-0.4,-6.8) V10(0.4,-6.8) V11(1.2,-6.8) V12(2,-6.8) V13(2.8,-6.8) V14(3.6,-6.8) V15(4.4,-6.8) V16(5.2,-6.8) V17(6,-6.8) V18(6.8,-6.8)
  silkscreen extent -10.67,-10.67 10.67,10.67, body extent -7.5,-7.5 7.5,7.5, height 1.5
CUI_PJ-002A [mm]
  oval 2.5x5 hole 1 slot 3.5 at 90 deg: 1(0,0)
  oval 2.25x4.5 hole 1 slot 3 at 90 deg: 2(6,0)
  oval 4.5x2.25 hole 1 slot 3 at 0 deg: 3(3,4.7)
  silkscreen extent -2.2,-4.5 13.7,4.5, body extent -0.68,-4.57 13.72,4.83, height 11.1
"LTM4643 15X9X2.42 05-08-1908" [mil]
  round 31 smd: A1(-150,250) A2(-100,250) A3(-50,250) A4(0,250) A5(50,250) A6(100,250) A7(150,250) B1(-150,200) B2(-100,200) B3(-50,200) B4(0,200) B5(50,200) B6(100,200) B7(150,200) C1(-150,150) C2(-100,150) C3(-50,150) C4(0,150) C5(50,150) C6(100,150) C7(150,150) D1(-150,100) D2(-100,100) D3(-50,100) D4(0,100) D5(50,100) D6(100,100) D7(150,100) E1(-150,50) E2(-100,50) E3(-50,50) E4(0,50) E5(50,50) E6(100,50) E7(150,50) F1(-150,0) F2(-100,0) F3(-50,0) F4(0,0) F5(50,0) F6(100,0) F7(150,0) G1(-150,-50) G2(-100,-50) G3(-50,-50) G4(0,-50) G5(50,-50) G6(100,-50) G7(150,-50) H1(-150,-100) H2(-100,-100) H3(-50,-100) H4(0,-100) H5(50,-100) H6(100,-100) H7(150,-100) J1(-150,-150) J2(-100,-150) J3(-50,-150) J4(0,-150) J5(50,-150) J6(100,-150) J7(150,-150) K1(-150,-200) K2(-100,-200) K3(-50,-200) K4(0,-200) K5(50,-200) K6(100,-200) K7(150,-200) L1(-150,-250) L2(-100,-250) L3(-50,-250) L4(0,-250) L5(50,-250) L6(100,-250) L7(150,-250)
  silkscreen extent -197,-315 197,315
MOLEX_87832-1420 [mm]
  rect 2.75x1 smd: 1(-2.13,6) 2(2.13,6) 3(-2.13,4) 4(2.13,4) 5(-2.13,2) 6(2.13,2) 7(-2.13,0) 8(2.13,0) 9(-2.13,-2) 10(2.13,-2) 11(-2.13,-4) 12(2.13,-4) 13(-2.13,-6) 14(2.13,-6)
  round 1.05 hole 1.05 unplated: ""(0,5) ""(0,-5)
  silkscreen extent -4.31,-8.32 3.15,8.32, body extent -3.15,-8.33 3.15,8.32, height 7.65
RES_CRCW_0402#1 [mm]
  rect 0.6x0.6 smd paste+0 mask+0.051: 1(-0.5,0) 2(0.5,0)
  silkscreen extent -0.08,-0.28 0.08,0.28, body extent -0.52,-0.28 0.52,0.28, height 0.41
RES_CRCW_0402#2 [mm]
  rect 0.6x0.6 smd: 1(-0.5,0) 2(0.5,0)
  silkscreen extent -0.08,-0.28 0.08,0.28, body extent -0.52,-0.28 0.52,0.28, height 0.41
RESC1508X06N [mm] "Chip Resistor, 2-Leads, Body 1.55x0.80mm, IPC Medium Density"
  rect 0.65x0.9 smd: 1(-0.725,0) 2(0.725,0)
  silkscreen extent -0.23,-0.46 0.23,0.46, body extent -0.85,-0.48 0.85,0.48, height 0.55
SAMTEC-HTSW-106-07-X-S [mm]
  round 1.62 hole 1.02: 1(-6.35,0) 2(-3.81,0) 3(-1.27,0) 4(1.27,0) 5(3.81,0) 6(6.35,0)
  silkscreen extent -8.07,-1.69 8.07,1.69, body extent -7.62,-1.24 7.62,1.24, height 8.38
SFM-110-02-L-S [mil]
  rrect50% 108x29 smd: 1(-24,225) 2(24,175) 3(-24,125) 4(24,75) 5(-24,25) 6(24,-25) 7(-24,-75) 8(24,-125) 9(-24,-175) 10(24,-225)
  silkscreen extent -120,-355 110,355, body extent -62,-328 63,327, height 185
SIT8008AI-12-33E-100.000000E [mm]
  rect 1x1.1 smd: 1(-0.75,0.95) 2(-0.75,-0.95) 3(0.75,-0.95) 4(0.75,0.95)
  silkscreen extent -1.1,1.6 -1,1.7, body extent -1,-1.25 1,1.25, height 0.6
SODFL160X70-2L [mm] "SODFL, 2-Leads, Body 0.80x1.60mm, IPC High Density"
  rect 0.55x0.3 smd: A(0.7,0) C(-0.7,0)
  silkscreen extent -0.92,0.4 -0.83,0.5, body extent -0.8,-0.45 0.8,0.45, height 0.7
SOIC50P1340X125-32N [mil]
  rrect50% 56x9 smd: 1(-254,148) 2(-254,128) 3(-254,108) 4(-254,89) 5(-254,69) 6(-254,49) 7(-254,30) 8(-254,10) 9(-254,-10) 10(-254,-30) 11(-254,-49) 12(-254,-69) 13(-254,-89) 14(-254,-108) 15(-254,-128) 16(-254,-148) 17(254,-148) 18(254,-128) 19(254,-108) 20(254,-89) 21(254,-69) 22(254,-49) 23(254,-30) 24(254,-10) 25(254,10) 26(254,30) 27(254,49) 28(254,69) 29(254,89) 30(254,108) 31(254,128) 32(254,148)
  silkscreen extent -215,-159 215,159
SOIC127P790X216-8N_MX25L3233FM2I-08G [mm]
  rrect25% 1.61x0.61 smd: 1(-3.605,1.905) 2(-3.605,0.635) 3(-3.605,-0.635) 4(-3.605,-1.905) 5(3.605,-1.905) 6(3.605,-0.635) 7(3.605,0.635) 8(3.605,1.905)
  silkscreen extent -5.31,-2.62 2.64,2.62
SOP50P310X90-8N [mil]
  rrect50% 42x10 smd: 1(-56,30) 2(-56,10) 3(-56,-10) 4(-56,-30) 5(56,-30) 6(56,-10) 7(56,10) 8(56,30)
  silkscreen extent -24,29 24,41, body extent -61,-39 61,39, height 34
SOP127P1030X265-16N [mm] "SOP, 16-Leads, Body 10.30x7.50mm, Pitch 1.27mm, IPC Medium Density"
  rrect50% 1.9x0.6 smd: 1(-4.75,4.445) 2(-4.75,3.175) 3(-4.75,1.905) 4(-4.75,0.635) 5(-4.75,-0.635) 6(-4.75,-1.905) 7(-4.75,-3.175) 8(-4.75,-4.445) 9(4.75,-4.445) 10(4.75,-3.175) 11(4.75,-1.905) 12(4.75,-0.635) 13(4.75,0.635) 14(4.75,1.905) 15(4.75,3.175) 16(4.75,4.445)
  silkscreen extent -4.87,-5.25 3.4,5.42, body extent -5.16,-5.25 5.16,5.25, height 2.65
TE_3-1734592-7 [mm]
  rect 0.3x1.1 smd: 1(-9,0) 2(-8.5,0) 3(-8,0) 4(-7.5,0) 5(-7,0) 6(-6.5,0) 7(-6,0) 8(-5.5,0) 9(-5,0) 10(-4.5,0) 11(-4,0) 12(-3.5,0) 13(-3,0) 14(-2.5,0) 15(-2,0) 16(-1.5,0) 17(-1,0) 18(-0.5,0) 19(0,0) 20(0.5,0) 21(1,0) 22(1.5,0) 23(2,0) 24(2.5,0) 25(3,0) 26(3.5,0) 27(4,0) 28(4.5,0) 29(5,0) 30(5.5,0) 31(6,0) 32(6.5,0) 33(7,0) 34(7.5,0) 35(8,0) 36(8.5,0) 37(9,0)
  rect 2.3x3.1 smd: S1(-10.67,-1.7) S2(10.67,-1.7)
  silkscreen extent -11.97,-4.55 11.97,1.3, body extent -11.96,-5.09 11.97,0.02, height 2.02

## Part data
C1 C2 C3 C7 C14 C17 C20 C23 C24 C60: library part 100nf_0402, "0402"
C4 C5 C6: library part 1uf_0402, "0402"
C8: library part 100uf_1206, "1206"
C9 C28 C32 C36 C39: library part 4.7uf_0402, "0402"
C10 C11 C26 C29 C30 C33 C37 C40: library part 0.47uf_0402, "0402"
C12 C15 C18 C21: library part 10uf_0402, "0402"
C13 C16 C19 C22 C25 C27 C31 C34 C35 C38 C59: library part 47uf_0805, "0805"
C41 C42 C43 C44 C45 C46 C47 C48 C49 C50 C51 C52 C53 C54 C55 C56 C57 C58: library part 47nf_0402, "0402"
C61: library part 10nf_0402, "0402"
D1: "Green 569nm LED Indication - Discrete 2.1V 10mA 0603", Manufacturer="Lite-On Inc.", Package="0603 Lite-On", Availability=Unavailable, Manufacturer Part Number 1=LTST-C190GKT
D2: "TVS Diode 3.3V 8V SOD523"
FB1 FB2: library part HZ0805E601R-10, "FERRITE BEAD 600 OHM 0805", Manufacturer 1="Laird-Signal Integrity", Manufacturer Part Number 1=HZ0805E601R-10
J1: "Connector Header Surface Mount 14 position 0.079 _2.00mm_", Package=None, Availability=Unavailable, MF=Molex, MP=87832-1420, Price=None, SnapEDA_Link=https://www.snapeda.com/parts/87832-1420/Molex/view-part/78740/?ref=snap
J4: "2.0 mm Center Pin, 2.5 A, Right Angle, Through Hole, Dc Power Jack Connector", Package=None, CUI_purchase_URL=https://www.cui.com/product/interconnect/dc-power-connectors/jacks/2.0-mm-center-pin/pj-002a?utm_source=snapeda.com&utm_medium=referral&utm_campaign=snapedaBOM, Digi-Key_Part_Number=CP-002A-ND, Digi-Key_Purchase_URL=https://www.digikey.com/product-detail/en/cui-inc/PJ-002A/CP-002A-ND/96962?utm_source=snapeda&utm_medium=aggregator&utm_campaign=symbol, MF="CUI Inc.", MP=PJ-002A, SnapEDA_Link=https://www.snapeda.com/parts/PJ-002A/CUI%20Inc./view-part/?ref=snap
J5: "Conn FPC Connector SKT 37 POS 0.5mm Solder RA SMD T/R", Package=None, Availability=Unavailable, DigiKey-Purchase-URL=https://snapeda.com/shop?store=DigiKey&id=4788466, MF="TE Connectivity", MP=3-1734592-7, Price=None, SnapEDA_Link=https://www.snapeda.com/parts/3-1734592-7/TE%20Connectivity/view-part/4788466/?ref=snap
J6: "6 pin 2.54mm pitch header"
R1 R16 R21 R26 R27 R57: library part 1k_0402, "0402", Tolerance=1%
R2 R3 R66: library part 10K_0402, "0402", Manufacturer Part Number 1=CRCW040210K0FKED, Tolerance=1%
R4: library part 300OHM_0402, "0402", Power=1/10W, Tolerance=1%
R5 R6 R7 R8 R9 R13: library part 4.7K_0402, "0402", Tolerance=1%
R10 R17 R18 R19 R20 R58: library part 0OHM_0402, "0402"
R11 R12 R14 R15: library part 100OHM_0402, "0402", Tolerance=1%
R22 R23 R25 R64 R65 R67: library part NC_0402
R24 R28: library part 22OHM_0402, "0402", Tolerance=1%
R29: library part 30.1K_0402, "0402", Tolerance=1%
R30: library part 90.9K_0402, "0402", Tolerance=1%
R31: library part 13.3K_0402, "0402", Tolerance=1%
R32: library part 14.5K_0402, "0402", Tolerance=1%
R33 R34 R68: library part 100K_0402, "0402", Tolerance=1%
R35 R36 R37 R38 R39 R40 R41 R42 R43 R44 R45 R46 R47 R48 R49 R50 R51 R52 R53 R54 R55 R56: library part 200OHM_0402, "0402", Tolerance=1%
R59 R60 R61 R62 R63: library part 0.01OHM_0603, "0603"
SW1: Case/Package=SMD/SMT, Contact Current Rating=50mA, Contact Resistance=100mR, IP Rating="IP67,Waterproof,Dust Tight", Manufacturer=Omron, Max Operating Temperature=70°C, Max Voltage Rating (DC)=24V, Min Operating Temperature=-25°C, Operating Force=1.57N, Package Quantity=1, Supplier Part Number 1=SW261TR-ND, ComponentLink1Description=https://datasheet.ciiva.com/1532/en-b3sn-1532676.pdf, ComponentLink1URL=https://datasheet.ciiva.com/1532/en-b3sn-1532676.pdf, ComponentLink2Description=https://datasheet.ciiva.com/16154/en-b3sn-16154998.pdf, ComponentLink2URL=https://datasheet.ciiva.com/16154/en-b3sn-16154998.pdf, ComponentLink3Description=https://datasheet.ciiva.com/2900/b3sn-1110-2900023.pdf, ComponentLink3URL=https://datasheet.ciiva.com/2900/b3sn-1110-2900023.pdf, ComponentLink4Description=https://datasheet.ciiva.com/5283/en-b3sn-371257-5283623.pdf, ComponentLink4URL=https://datasheet.ciiva.com/5283/en-b3sn-371257-5283623.pdf, ComponentLink5Description=https://datasheet.ciiva.com/2900/b3sn-1110-2900024.pdf, ComponentLink5URL=https://datasheet.ciiva.com/2900/b3sn-1110-2900024.pdf, ComponentLink6Description=https://datasheet.ciiva.com/2900/b3sn-1110-2900025.pdf, ComponentLink6URL=https://datasheet.ciiva.com/2900/b3sn-1110-2900025.pdf, ComponentLink7Description=https://datasheet.ciiva.com/15183/getdatasheetpartid-87284-15183738.pdf, ComponentLink7URL=https://datasheet.ciiva.com/15183/getdatasheetpartid-87284-15183738.pdf, ComponentLink8Description=https://datasheet.ciiva.com/30076/en-b3sn-30076973.pdf, ComponentLink8URL=https://datasheet.ciiva.com/30076/en-b3sn-30076973.pdf, Contact Material=Gold, Contact Plating=Gold, Current Rating=50mA, Depth=7mm, Electrical Life=50000Cycles, Height=3.1mm, Illumination Type=Non-Illuminated,Illuminated, Lead Free="Contains Lead", Length=6.5mm, Manufacturer Part Number=B3SN-3012P, Max Current Rating=50mA, Mechanical Life=100000Cycles, Mount="Surface Mount", Number of Poles=1, Orientation=Straight, Packaging="Tape and Reel", Pricing 1="3000=0.52365 (USD)", Radiation Hardening=No, REACH SVHC=Unknown, Stock 1=48000, Supplier 1=Digi-Key, Switch Function=Off-Mom, Switch Travel=0.25mm, Termination=SMD/SMT, Throw Configuration=SPST, Voltage Rating (DC)=24V, Weight=0.007055oz
U1: library part XC7A12T_1CSG325I
U2: "256 Mb Flash Micron"
U3: "FLASH - NOR Memory IC 32Mb _8M x 4_ SPI - Quad I/O 133MHz 8-SOP", Package="SOIC-8 Macronix", Availability=Unavailable, MF=Macronix, MP=MX25L3233FM2I-08G, Price=None, SnapEDA_Link=https://www.snapeda.com/parts/MX25L3233FM2I-08G/Macronix/view-part/2101968/?ref=snap
U5: "Buffer, Non-Inverting 2 Element 1 Bit per Element 3-State Output 8-VSSOP", Package="VFSOP-8 Texas Instruments", Availability=Unavailable, MF="Texas Instruments", MP=SN74LVC2G241DCUR, Price=None, SnapEDA_Link=https://www.snapeda.com/parts/SN74LVC2G241DCUR/Texas%20Instruments/view-part/278306/?ref=snap
U6: "SRAM - Asynchronous Memory IC 4Mb _512K x 8_ Parallel 55ns 32-sTSOP I", Package="LFSOP-32 ISSI", Digi-Key_Part_Number=IS62WV5128BLL-55HLI-TR-ND, MF="ISSI, Integrated", MP=IS62WV5128BLL-55HLI, SnapEDA_Link=https://www.snapeda.com/parts/IS62WV5128BLL-55HLI/ISSI,%20Integrated%20Silicon%20Solution%20Inc/view-part/33690/?ref=snap
X1: library part SIT8008AI-12-33E-100.000000E

## Via types
v1: diameter 18/10/10/18 (per signal layer), hole 10, Top Layer to Bottom Layer, tented top, 241 vias
v2: diameter 18/10/10/18 (per signal layer), hole 10, Top Layer to Bottom Layer, 173 vias
v3: diameter 30, hole 26, Top Layer to Bottom Layer, 32 vias

## Nets (pads, with @x,y where several pads share a name; then routed paths per layer and width w, separated by ;. In a path a pad name is that pad's centre, name@x,y a point inside that pad or via, vN(x,y) a via of type N, cw(c..) or ccw(c..) an arc to the next point about the centre after c; other vN are vias at no path point)
1V0Good: R34.2 U4.C2 U4.C6 | length 586.2
  Top Layer w8: 3559.31,3877.27 3559.31,3820.04 3561.92,3817.42 3561.92,3771.45 U4.C6@3587.16,3746.21
  Top Layer w10: v1(3535.92,3846.82) 3537,3847.9 3537,3870.82 R34.2@3559.31,3893.13 ; v1(3562.27,3521.26) U4.C2@3587.16,3546.21
  Top Layer w11.55: 3559.31,3877.27 R34.2@3559.31,3893.13
  Bottom Layer w10: v1(3535.92,3846.82) 3535.92,3547.61 v1(3562.27,3521.26)
1V8Good: R33.2 U4.C3 U4.J6 U4.K7 | length 727
  Top Layer w10: v1(3561.88,3621.22) 3562.01,3621.22 3587.02,3596.21 U4.C3@3587.16,3596.21 ; v1(3887.07,3856.8) 3888.6,3858.33 3888.6,3871.65 R33.2@3910.49,3893.54 3911.2,3892.83 3911.2,3822.41 3911.91,3821.69 ; U4.J6@3887.28,3746.21 3937.16,3796.1 U4.K7@3937.16,3796.21 ; 3911.91,3821.58 U4.K7@3937.16,3796.33
  Bottom Layer w10: v1(3561.88,3621.22) 3588.49,3647.83 3708.82,3647.83 3726.37,3665.38 3726.37,3739.43 3843.74,3856.8 v1(3887.07,3856.8)
100MHZCLK: R58.1 U1.T15 | length 285.5
  Top Layer w5: U1.T15@4222.46,2575.51 4238.03,2559.94 4238.03,2534.58 4242.8,2529.81 4244.37,2528.23 4262.23,2528.23 4269.52,2520.94 4269.52,2479.53 4269.52,2470.53 4283.94,2456.12 4283.94,2433.64
  Top Layer w11.55: 4283.94,2433.64 4283.94,2341.21 4284.18,2340.97 4284.18,2333.99 R58.1@4289.82,2328.34
+1V0: C8.1 C9.1 C10.1 C11.1 C25.1 C26.1 C41.1 C42.1 C43.1 C44.1 C45.1 C46.1 C47.1 R60.1 U1.F7 U1.F9 U1.F11 U1.G8 U1.G10 U1.H7 U1.H9 U1.H11 U1.J8 U1.J12 U1.K7 U1.K11 U1.L8 U1.L12 U1.M7 U1.M11 U1.N8 U1.N10 U1.N12 U1.P9 U1.P11 | length 1184.1
  Top Layer w5: v1(3954.74,2685.75) U1.M7@3970.49,2701.49 ; v1(3954.74,2748.74) U1.K7@3970.49,2764.49 ; v1(3954.74,2843.23) U1.H7@3970.49,2827.48 ; v1(3954.74,2906.22) U1.F7@3970.49,2890.47 ; v1(3986.24,2654.25) U1.N8@4001.98,2670 ; v1(3986.24,2717.24) U1.L8@4001.98,2732.99 ; v1(3986.24,2811.73) U1.J8@4001.98,2795.98 ; v1(3986.24,2874.72) U1.G8@4001.98,2858.97 ; v1(4017.73,2622.75) U1.P9@4033.48,2638.5 ; v1(4017.73,2843.23) U1.H9@4033.48,2827.48 ; U1.F9@4033.48,2890.47 v1(4049.23,2874.72) ; U1.N10@4064.98,2670 v1(4080.73,2654.25) ; U1.G10@4064.98,2858.97 v1(4080.73,2874.72) ; v1(4080.73,2780.23) U1.K11@4096.47,2764.49 ; U1.P11@4096.47,2638.5 v1(4112.22,2622.75) ; U1.M11@4096.47,2701.49 v1(4112.22,2685.75) ; U1.H11@4096.47,2827.48 v1(4112.22,2843.23) ; U1.F11@4096.47,2890.47 v1(4112.22,2906.22) ; v1(4112.22,2748.74) U1.L12@4127.97,2732.99 ; U1.N12@4127.97,2670 v1(4143.72,2654.25) ; U1.J12@4127.97,2795.98 v1(4143.72,2811.73)
  Top Layer w10: C9.1@3967.31,2364.18 3971.97,2368.83 3971.97,2394.6 v2(3973.5,2396.13)
  Bottom Layer w5: C11.1@3923.4,2809.19 3923.4,2811.16 3954.74,2842.5 v1(3954.74,2843.23) ; v1(3954.74,2748.74) 3968.26,2762.25 C44.1@3968.26,2780.99 ; C46.1@4013.1,2907.45 4013.1,2905.48 4041.37,2877.21 4046.74,2877.21 v1(4049.23,2874.72) ; v1(4017.73,2969.21) 4028.4,2979.88 C43.1@4049.07,2979.88 ; C45.1@4050.57,2663.81 4071.16,2663.81 v1(4080.73,2654.25)
  Bottom Layer w10: 3758.1,3122.22 3758.1,3110.11 v1(3758.55,3109.66) ; 3986.34,2443.9 4003.71,2461.27 4029.07,2461.27 4041.79,2473.99 4041.79,2544.38 4064.13,2566.72 4064.13,2574.66 v1(4112.22,2622.75) ; v1(4017.73,2622.75) 4019.26,2624.28 4037.64,2624.28 C41.1@4041.15,2627.79 C41.1@4043.11,2627.79
  Bottom Layer w11.55: C8.1@3662.61,3208.08 v2(3707.27,3208.08) ; 3758.1,3122.22 C26.1@3758.1,3141.48 ; C25.1@3952.59,2332.58 C25.1@3952.59,2344.39 3962.17,2353.98 3962.17,2383.27 3973.5,2394.59 v2(3973.5,2396.13) v2@3973.5,2397.57 ; v2@3973.72,2397.79 v2@3973.5,2397.57 ; 3986.34,2443.9 3972.67,2430.22 C10.1@3972.67,2428.26 3973.5,2427.43 v2@3973.5,2397.57
  other v2: 3524.68,3245.17 3563.56,3246.47 3488.75,3280.12 3525.34,3279.8 3562.25,3286 3560.29,3319
+1V0Reg: C16.2 R60.2 U4.C1 U4.D1 U4.D2 | length 189.9
  Top Layer w10: R60.2@3510.43,3376.04 3511.27,3376.88 v2(3511.27,3403.71) ; v1@3561.79,3470.97 U4.C1@3587.04,3496.21 ; C16.2@3576.38,3374.78 3576.38,3386.59 3595.77,3405.98 v2(3595.77,3421.38) ; v1@3611.68,3471.08 3611.79,3470.97 U4.D1@3637.04,3496.21 ; v1@3611.79,3520.97 U4.D2@3637.04,3546.21
  other v1: 3561.68,3470.97 3611.68,3470.97 3611.68,3520.97
  other v2: 3544.58,3357.94 3544.58,3393.33 3541.3,3431.34 3578.66,3442.48
+1V8: C27.1 C28.1 C29.1 C30.1 C38.1 C39.1 C40.1 C48.1 C56.1 C57.1 C58.1 FB1.2 R59.1 R64.1 R65.1 U1.E11 U1.G12 U1.H13 U1.K13 U1.L6 U1.M3 U1.M13 U1.P7 U1.P13 U1.R4 U1.T1 U1.V5 | length 751.5
  Top Layer w5: v1(3731.18,2575.28) v1@3731.41,2575.51 ; v1(3828.76,2685.75) U1.M3@3844.5,2701.49 ; v1(3860.25,2591.26) U1.R4@3876,2607.01 ; U1.V5@3907.5,2512.52 3907.68,2512.33 3907.68,2484.56 v1(3907.87,2484.37) ; v1(3922.68,2716.39) 3922.68,2716.68 U1.L6@3938.99,2732.99 ; v1(3954.74,2622.75) U1.P7@3970.49,2638.5 ; U1.E11@4096.47,2921.97 v1(4112.22,2937.71) ; U1.G12@4127.97,2858.97 v1(4143.72,2874.72) ; v1(4143.72,2717.24) U1.M13@4159.47,2701.49 ; U1.P13@4159.47,2638.5 v1(4175.21,2622.75) ; U1.K13@4159.47,2764.49 v1(4175.21,2748.74) ; U1.H13@4159.47,2827.48 v1(4175.21,2843.23)
  Top Layer w10: v1@3731.41,2575.51 U1.T1@3781.51,2575.51
  Top Layer w11.55: v2(2825.69,2786.91) 2825.89,2786.72 2857.82,2786.72 R65.1@2858.01,2786.52 ; R64.1@3321.91,3107.68 3322.42,3107.17 3350.21,3107.17 v2(3350.72,3106.66)
  Bottom Layer w5: C40.1@3730.69,2603.93 C40.1@3731.18,2603.44 ; C56.1@3855.16,2562.81 3855.16,2582.64 3860.25,2587.74 v1(3860.25,2591.26) ; C58.1@3892.31,2706.49 3912.77,2706.49 v1(3922.68,2716.39) ; C39.1@3902.37,2452.1 3907.87,2457.6 v1(3907.87,2484.37) ; C57.1@3927.53,2619.4 3930.88,2622.75 v1(3954.74,2622.75) ; v1(4175.21,2843.23) 4199.46,2843.23 C48.1@4202.92,2839.77
  Bottom Layer w10: v1(3731.18,2575.28) C40.1@3731.18,2603.44 ; C29.1@4156.61,2779.51 4156.61,2777.54 4172.73,2761.42 4172.73,2751.23 v1(4175.21,2748.74)
  Bottom Layer w11.55: C27.1@3464.88,2520.9 3474.53,2520.9 3484.11,2530.48 v2(3484.11,2560.7) ; C38.1@3559.77,2505.84 3571.58,2505.84 3581.16,2496.26 3581.16,2469.93 3582.81,2468.28 v2(3582.81,2466.75) ; v2(3561.07,2917.87) 3586.93,2917.87 3602.41,2902.38 FB1.2@3602.41,2896.54
  other v2: 3261.14,3250.85 3379.53,3251.96 3311.17,3252.51 3261.69,3291.42 3311.72,3290.87 3379.53,3292.53 3350.07,3328.11 3416.78,3328.66
+1V8Reg: C13.2 R59.2 U4.A1 U4.A2 U4.A3 | length 204.1
  Top Layer w10: R59.2@3307.55,3387.03 3308.81,3388.29 3346.38,3388.29 v2(3347.65,3389.55) ; C13.2@3307.82,3447.87 3319.63,3447.87 3340.19,3468.43 3352.99,3468.43 v2(3354.52,3469.96) ; v1@3461.79,3470.97 U4.A1@3487.04,3496.21 ; v1@3461.79,3520.97 U4.A2@3487.04,3546.21 ; v1@3461.79,3570.97 U4.A3@3487.04,3596.21
  other v1: 3461.68,3470.97 3426.57,3493.23 3461.68,3520.97 3425.6,3546.27 3461.68,3570.97
  other v2: 3393.71,3388.78 3427.22,3421.64 3374.84,3425.22
+3V1: C5.1 J5.16 R62.1 | length 3568.4
  Top Layer w10: C5.1@5429.16,2181.38 5461.4,2181.38 v2(5462.67,2180.1)
  Top Layer w30: R62.1@4044.88,3378.21 4044.88,3344.09 v2(4055.03,3333.95) ; v2(5209.13,2617) 5209.13,2355.46 5302.84,2261.75 5348.8,2261.75 C5.1@5429.16,2181.38
  Bottom Layer w10: v2(5462.67,2180.1) 5463.12,2179.66 5504.22,2179.66 J5.16@5504.66,2179.21
  Bottom Layer w30: v2(4055.03,3333.95) 4127.62,3333.95 4717.31,3923.65 5250.57,3923.65 5400.94,3773.27 5400.94,2808.81 v2(5209.13,2617) v2@5209.13,2618.64
  other v2: 4012.71,3357.44 3982.47,3357.88 4012.93,3387.23 3982.03,3388.12